# EAGLE board ece411_t2_schematic_9 (EAGLE 9.5.2)
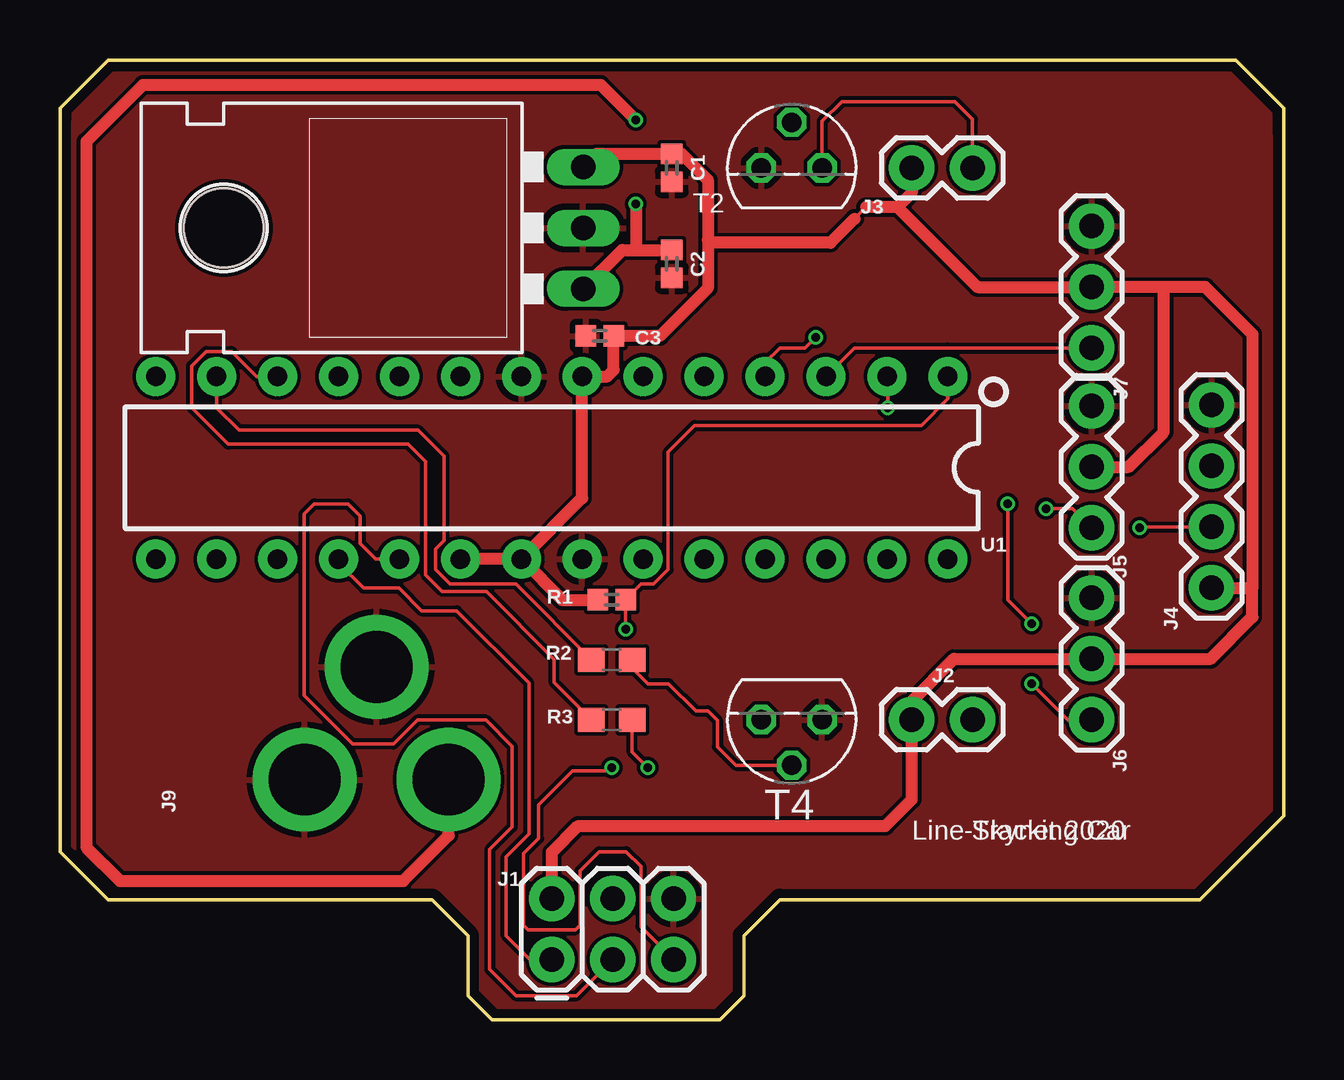
[diagram p0: board, top side]
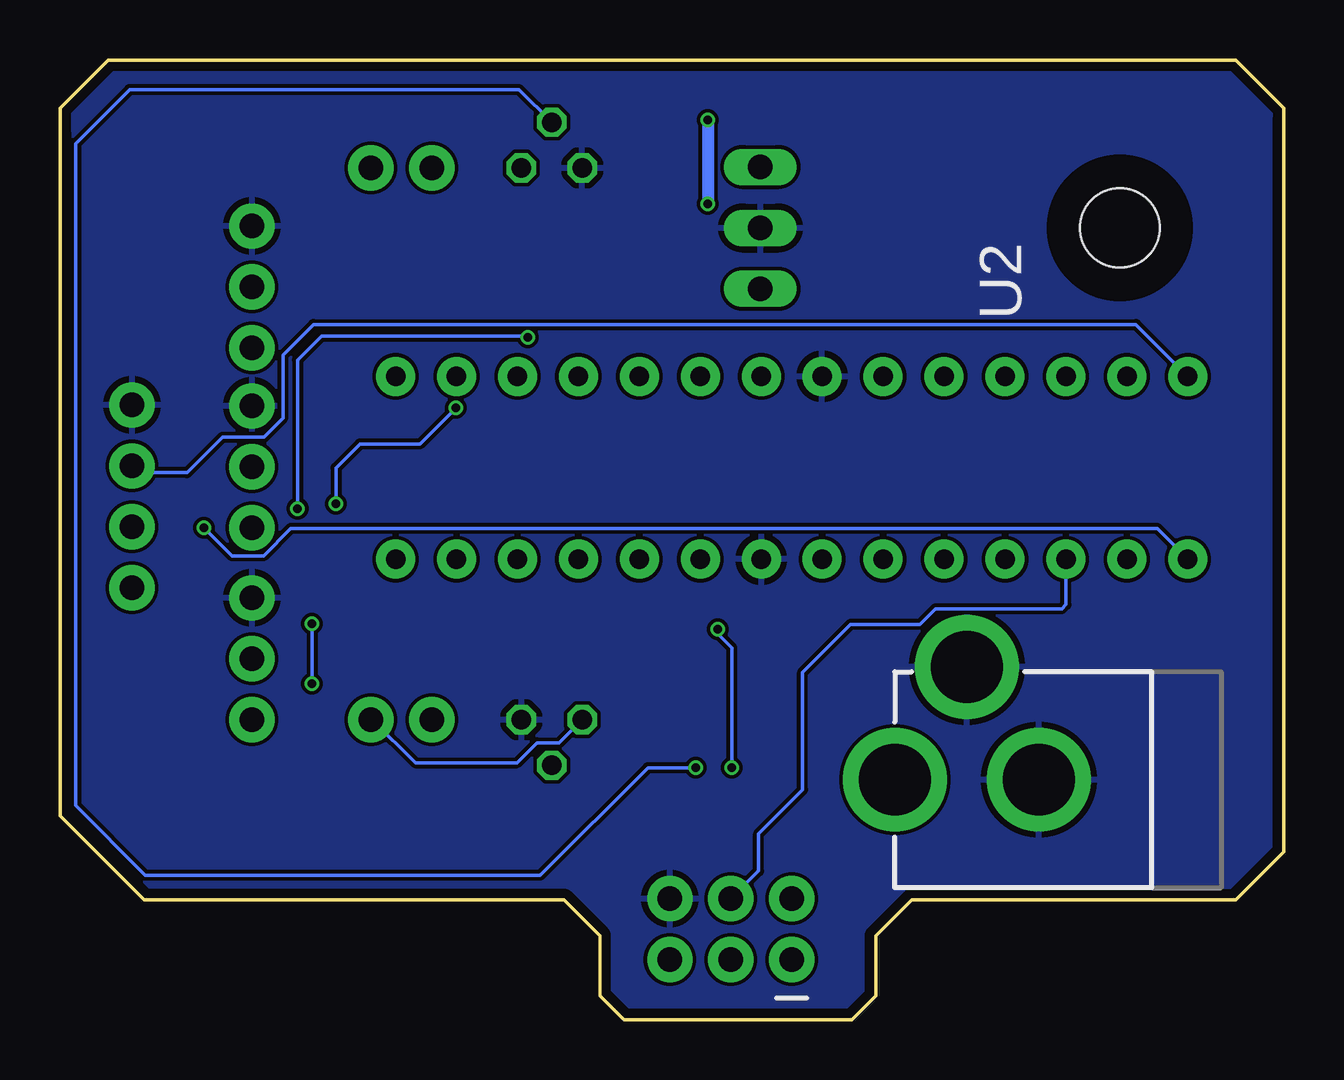
[diagram p1: board, bottom side, seen from below]

Size 51 x 40 mm. Coordinates in mm from the lower left corner, seen from the top.
Outline: 18,0 27.5,0 28.5,1 28.5,3.5 30,5 47.5,5 51,8.5 51,37 51,38 49,40 2,40 0,38 0,37.5 0,7 2,5 15.5,5 17,3.5 17,1 18,0
Copper layers (1*16): Top 0.035559375mm / dielectric 1.6mm / Bottom 0.035559375mm
Design rules "oshpark-2layer": minimum track width 6mil, minimum drill 10mil, track to track 6mil, track to pad 6mil, pad to pad 6mil, via to via 6mil, smd to smd 6mil, copper to edge 15mil, drill to drill 6mil, minimum pad ring 5mil, minimum via ring 5mil, stop-mask expansion 2.5mil, vias tented up to drill 0mil, thermal gap 10mil

## Footprints (pad centres in the part's own frame; a part is rotated, then mirrored left to right if it is on the bottom)
0402 = smd 0.85 x 0.9: 1 -0.58,0; 2 0.58,0
2X3 = drill 1.016 pad 1.88: 1 0,0; 2 0,2.54; 3 2.54,0; 4 2.54,2.54; 5 5.08,0; 6 5.08,2.54
1X02 = drill 1.016 pad 1.88: 1 0,0; 2 2.54,0
1X04 = drill 1.016 pad 1.88: 1 0,0; 2 2.54,0; 3 5.08,0; 4 7.62,0
1X03 = drill 1.016 pad 1.88: 1 0,0; 2 2.54,0; 3 5.08,0
POWER_JACK_PTH = drill 2.997 pad 4.318: GND 0,7.7; GNDBREAK 4.7,10.7; PWR 0,13.7
0603 = smd 1.1 x 1: 1 -0.85,0; 2 0.85,0
TO92 = drill 0.813 octagon: 1 1.27,0; 2 0,1.905; 3 -1.27,0
DIP28 = drill 0.813 pad 1.626: 1 -16.51,-3.81; 2 -13.97,-3.81; 3 -11.43,-3.81; 4 -8.89,-3.81; 5 -6.35,-3.81; 6 -3.81,-3.81; 7 -1.27,-3.81; 8 1.27,-3.81; 9 3.81,-3.81; 10 6.35,-3.81; 11 8.89,-3.81; 12 11.43,-3.81; 13 13.97,-3.81; 14 16.51,-3.81; 15 16.51,3.81; 16 13.97,3.81; 17 11.43,3.81; 18 8.89,3.81; 19 6.35,3.81; 20 3.81,3.81; 21 1.27,3.81; 22 -1.27,3.81; 23 -3.81,3.81; 24 -6.35,3.81; 25 -8.89,3.81; 26 -11.43,3.81; 27 -13.97,3.81; 28 -16.51,3.81
TO-220-ALT = drill 1.016 long: GND 0,-3.81; IN -2.54,-3.81; OUT 2.54,-3.81 | hole 3.302: 0,11.176

## Placement (x,y rotation side)
C1  0.1uF  [0402]  25.5,35.5 270 top
C2  0.1uF  [0402]  25.5,31.5 270 top
C3  0.1uF  [0402]  22.5,28.5 180 top
J1  AVR_SPI_PROG_3X2PTH  [2X3]  20.5,2.5 0 top
J2  Right Motor  [1X02]  35.5,12.5 0 top
J3  Left Motor  [1X02]  35.5,35.5 0 top
J4  Ultra Sonic Sensor  [1X04]  48,18 90 top
J5  455-1750-1-ND  [1X03]  43,20.5 90 top
J6  455-1750-1-ND  [1X03]  43,12.5 90 top
J7  455-1750-1-ND  [1X03]  43,28 90 top
J9  POWER_JACK  [POWER_JACK_PTH]  2.5,10 90 bottom
R1  10k  [0402]  23,17.5 0 top
R2  2.2k  [0603]  23,15 0 top
R3  2.2k  [0603]  23,12.5 0 top
T2  2N3904  [TO92]  30.5,35.5 0 top
T4  2N3904  [TO92]  30.5,12.5 180 top
U1  328P  [DIP28]  20.5,23 180 top
U2  LM7805  [TO-220-ALT]  18,33 90 top

## Library data of the parts
C1-C3 = SparkFun-Capacitors; PROD_ID: CAP-14993
J1 = SparkFun-Connectors
J2 J3 = SparkFun-Retired
J4 = SparkFun-Connectors; PROD_ID: CONN-09696
J5-J7 = SparkFun-Connectors; PROD_ID: XXX-00000
J9 = SparkFun-Connectors; PROD_ID: CONN-08197
R1 = SparkFun-Resistors; PROD_ID: RES-14241
R2 R3 = SparkFun-Resistors; PROD_ID: RES-08272
T2 T4 = transistor
U1 = SparkFun-IC-Microcontroller; PROD_ID: IC-09136
U2 = SparkFun-IC-Power; PROD_ID: VREG-08450; SF_ID: COM-00107

## Nets
GND: C1.2 C2.2 C3.2 J1.6 J4.4 J5.3 J6.3 J7.3 J9.GND J9.GNDBREAK T2.3 T4.3 U1.8 U1.22 U2.GND
MOSI: J1.4 U1.17
N$1: R3.1 U1.12
N$2: J3.2 T2.1
N$3: R2.2 T4.2
N$4: R3.2 T2.2
N$5: J1.1 U1.18
N$6: J2.2 T4.1
N$7: J5.1 U1.4
N$8: J7.1 U1.3
N$9: J6.1 U1.2
N$10: J1.5 R1.2 U1.1
N$11: J4.2 U1.15
N$12: J4.3 U1.14
N$15: R2.1 U1.13
SCK: J1.3 U1.19
VCC: C1.1 C3.1 J1.2 J2.1 J3.1 J4.1 J5.2 J6.2 J7.2 R1.1 U1.7 U1.20 U1.21 U2.OUT
VIN: C2.1 J9.PWR U2.IN

## Tracks (layer width: path | path; a pad name or v marks a point on that pad's centre or on a via)
GND
  pour Bottom: 2,40 0,38 0,7 2,5 15.5,5 17,3.5 17,1 18,0 27.5,0 28.5,1 28.5,3.5 30,5 47.5,5 51,8.5 51,38 49,40
  pour Top: 2,40 0,38 0,7 2,5 15.5,5 17,3.5 17,1 18,0 27.5,0 28.5,1 28.5,3.5 30,5 47.5,5 51,8.5 51,38 49,40
MOSI
  Bottom 0.152: J1.4 21.89,6.2 21.89,7.75 20.05,9.58 20.05,14.47 18.05,16.47 15.16,16.47 14.51,17.12 9.24,17.12 9.07,17.3 U1.17
N$1
  Top 0.152: R3.1 20.6,14.05 20.6,15.02 17.78,17.84 15.93,17.84 15.24,18.53 15.24,23.26 14.52,23.98 7.01,23.98 5.49,25.51 5.49,27.24 6.1,27.85 7.15,27.85 8.19,26.81 U1.12
N$2
  Top 0.152: J3.2 38.04,37.53 37.3,38.27 32.6,38.27 31.77,37.44 T2.1
N$3
  Top 0.152: T4.2 28.18,10.6 27.4,11.37 27.4,12.47 27,12.87 26.5,12.87 25.37,14 24.5,14 23.85,14.65 R2.2
N$4  (via drill 0.35)
  Top 0.152: R3.2 23.85,11.15 v24.5,10.5
  Bottom 0.152: T2.2 31.86,38.77 48.1,38.77 50.35,36.52 50.35,8.92 47.45,6.02 30.98,6.02 26.5,10.5 v24.5,10.5
N$5
  Top 0.152: U1.18 11.61,19.02 12.65,17.98 14.13,17.98 15.07,17.04 16.54,17.04 19.55,14.03 19.55,7.73 18.6,6.78 18.6,3.5 19.6,2.5 J1.1
N$6
  Bottom 0.152: J2.2 37.98,12.5 36.18,10.7 31.95,10.7 31.12,11.53 30.2,11.53 T4.1
N$7  (via drill 0.35)
  Top 0.152: v41.1,21.3 42.2,21.3 J5.1 | v31.5,28.44 31.06,28 30,28 29.39,27.39 U1.4
  Bottom 0.152: v31.5,28.44 31.5,28.5 40.1,28.5 41.1,27.5 v41.1,21.3
N$8
  Top 0.152: U1.3 33.12,28 37,28 | 37,28 J7.1 | 37,28
N$9  (via drill 0.35)
  Top 0.152: U1.2 34.5,26.78 v34.5,25.5 | v39.5,21.5 39.5,17.5 v40.5,16.5 | v40.5,14 42,12.5 J6.1
  Bottom 0.152: v34.5,25.5 36,24 38.5,24 39.5,23 v39.5,21.5 | v40.5,16.5 v40.5,14
N$10  (via drill 0.35)
  Top 0.152: v23.58,16.27 R1.2 24.23,18.15 24.74,18.15 25.35,18.76 25.35,23.66 26.46,24.77 35.9,24.77 37.01,25.88 U1.1 | J1.5 24.21,3.87 24.21,6.39 23.6,7 22.48,7 21.67,6.19 21.67,3.93 21.48,3.74 19.52,3.74 19.33,3.93 19.33,6.93 19.95,7.55 19.95,8.95 21.37,10.37 22.87,10.37 v23,10.5
  Bottom 0.152: v23,10.5 23,15.5 23.58,16.08 v23.58,16.27
N$11  (via drill 0.35)
  Top 0.152: v45,20.5 45.04,20.54 J4.2
  Bottom 0.152: U1.15 5.27,20.47 41.38,20.47 42.52,19.33 43.83,19.33 v45,20.5
N$12
  Bottom 0.152: U1.14 6.15,28.97 40.43,28.97 41.7,27.7 41.7,25.08 42.5,24.28 44.22,24.28 45.7,22.8 47.72,22.8 J4.3
N$15
  Top 0.152: U1.13 6.53,25.5 7.46,24.57 14.93,24.57 16,23.5 16,19.97 15.65,19.62 15.65,18.76 16.26,18.15 19,18.15 R2.1
SCK
  Top 0.152: U1.19 13.15,19.19 12.5,19.84 12.5,21 12,21.5 10.6,21.5 10.17,21.07 10.17,13.52 12.21,11.48 13.9,11.48 14.9,12.48 17.75,12.48 18.85,11.38 18.85,8.03 17.91,7.09 17.91,2.09 19,1 21.54,1 J1.3
VCC
  Top 0.152: 33.6,33.87 33.12,33.38 | J2.1 35.5,13.27
  Top 0.5: J3.1 35.5,34.47 34.9,33.87 | 34.9,33.87 33.6,33.87 | 33.12,33.38 32.12,32.38 27.11,32.38 27,32.5 | J1.2 20.5,6.97 21.6,8.07 34.4,8.07 35.5,9.17 J2.1 | 46,30.54 47.73,30.54 49.7,28.57 49.7,18 | 46,30.54 J7.2 38.23,30.54 34.9,33.87 | 35.5,13.27 37.27,15.04 J6.2 47.97,15.04 49.7,16.77 49.7,18 | U1.21 21.77,21.73 U1.7 22.81,26.81 23.08,27.08 C3.1 25,28.5 27,30.5 27,32.5 | 27,32.5 27,35 25.92,36.08 C1.1 22.35,36.08 U2.OUT | J4.1 49.7,18 | J5.2 44.54,23.04 46,24.5 46,30.54 | U1.21 U1.20 | R1.1 22.39,17.48 20.95,17.48 U1.21
VIN  (via drill 0.35)
  Top 0.5: J9.PWR 16.2,7.67 14.31,5.78 2.5,5.78 1.1,7.18 1.1,36.6 3.47,38.97 22.53,38.97 v24,37.5 | U2.IN 23.43,32.08 24,32.08 | 24,32.08 C2.1 | v24,34 24,32.08
  Bottom 0.5: v24,37.5 v24,34

## Text on the board
tPlace: Line-Tracking Car | Skynet 2020